# Altium PCB SteeringWheelConnectorBoard.PcbDoc
Units mm, origin at the board's own origin, x right, y up, seen from the top; angles counter-clockwise.
Board outline 16.27 x 32.5 mm, 2 copper layers (Top Layer, Bottom Layer); 2 components, 58 nets, 20 pads, 3 vias.
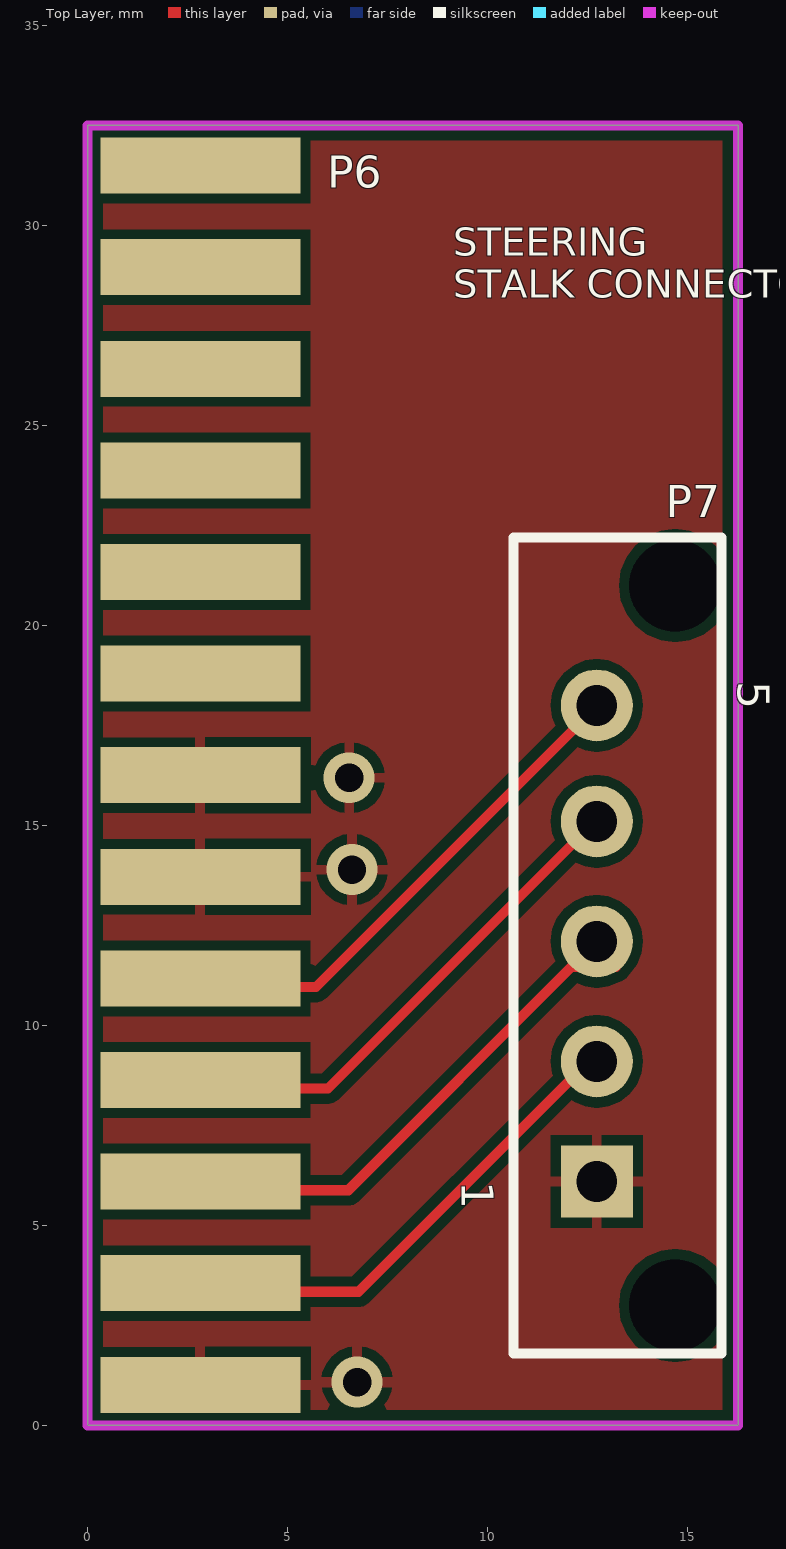
[diagram p0: Top Layer view]
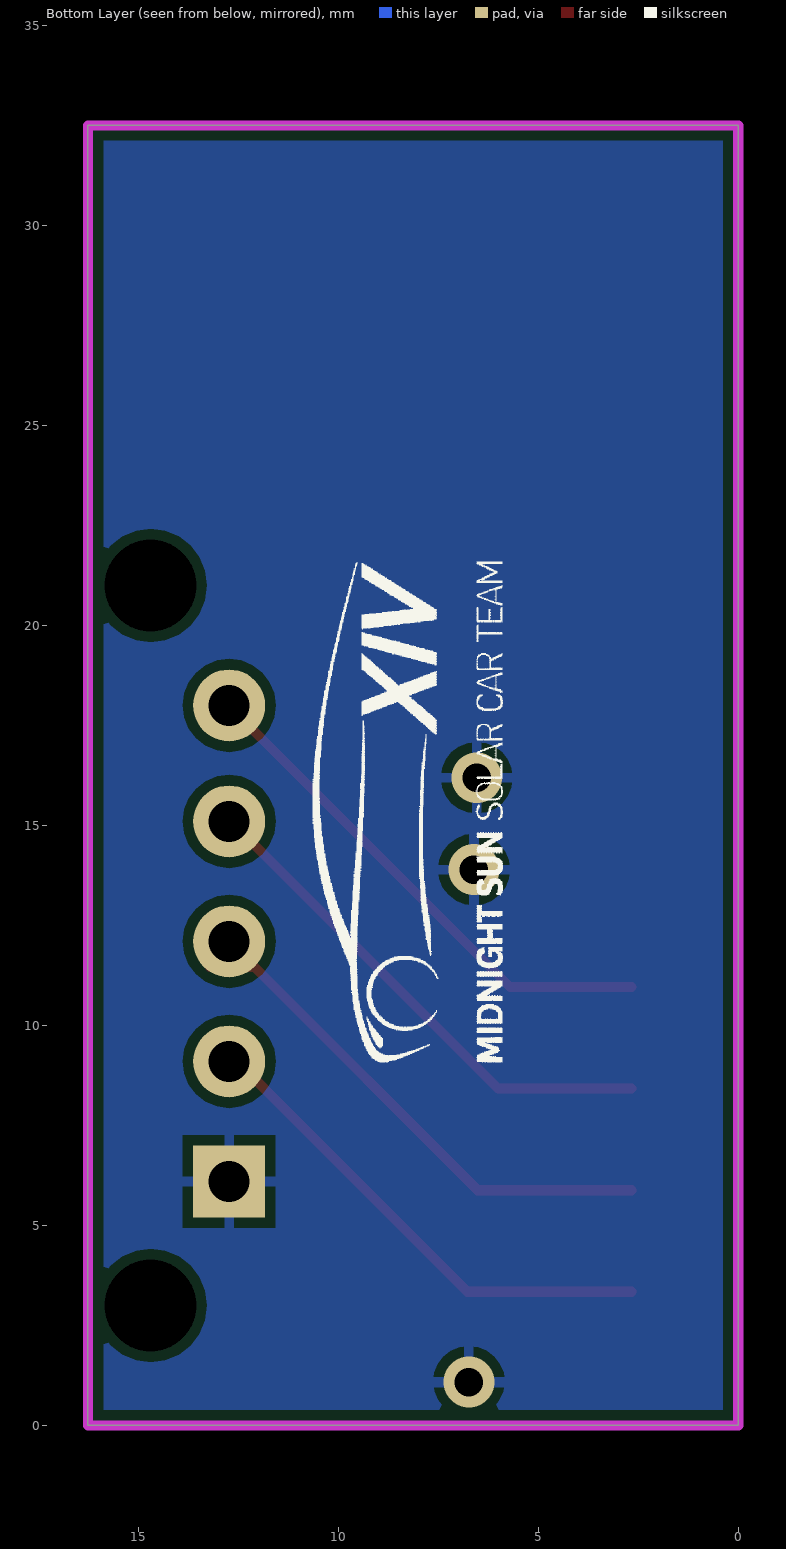
[diagram p1: Bottom Layer view, seen from below]

## Layer stack, top to bottom
Top Solder: solder mask 0.0102, Solder Resist, Dk 3.5
Top Layer: signal copper 0.0356
Dielectric 1: dielectric 0.32, FR-4, Dk 4.8
Bottom Layer: signal copper 0.0356
Bottom Solder: solder mask 0.0102, Solder Resist, Dk 3.5

## Board outline
0,32.5 0,0 16.268,0 16.268,32.5

## Design rules (kind name [scope] priority, off if disabled: settings)
Clearance [All] p1: gap=0.254 ignorepadtopadclearanceinfootprint=FALSE except(0: Arc-Hole Track-Hole SMDPad-Hole THPad-Hole Via-Hole Fill-Hole Poly-Hole Region-Hole Text-Hole)
PolygonConnect [All] p1: connectstyle=Relief reliefconductorwidth=0.254 reliefentries=4 polygonreliefangle="90 Angle" airgapwidth=0.254
RoutingVias [All] p1: holewidth=0.711 width=1.27 viastyle="Through Hole" minholewidth=0.711 minwidth=1.27 maxholewidth=0.711 maxwidth=1.27
SolderMaskExpansion [All] p1: expansion=0.102
Width [All] p1: maxlimit=0.254 minlimit=0.254 preferedwidth=0.254
30 further rules are at their usual default settings.

## Components (designator, comment, footprint, x,y, rotation, side; value= is the part's Value field where it differs from the comment)
P6 "Footprint Only" "CONN 13POS CARD EDGE" 2.819,1.016 r90 top
P7 "CONN 5POS MICRO-FIT 3mm" "CONN, 5POS MICRO-FIT 3mm" 13.75,18 r270 top

## Footprints (in the part's own frame and the unit in brackets; to place one, negate y for a bottom-side part, rotate by r counter-clockwise, add the part's x,y. Pads: shape width x height; smd on the part's side, far side on the other; paste and mask are expansions set on the pad)
"CONN 13POS CARD EDGE" [mm]
  rect 1.4x5 smd: 1(0,0) 2(2.54,0) 3(5.08,0) 4(7.62,0) 5(10.16,0) 6(12.7,0) 7(15.24,0) 8(17.78,0) 9(20.32,0) 10(22.86,0) 11(25.4,0) 12(27.94,0) 13(30.48,0)
"CONN, 5POS MICRO-FIT 3mm" [mm]
  round 0 hole 2.3: 0(-3,0.94) 0(15,0.94)
  rect 1.8x1.8 hole 1.02: 1(11.9,-1.02)
  round 1.8 hole 1.02: 2(8.9,-1.02) 3(5.9,-1.02) 4(2.9,-1.02) 5(0,-1.02)
  silkscreen extent -4.2,-3.1 16.2,2.1, body extent -3.42,-4.16 15.22,1.45, height 9.45

## Part data
P6: library part "CONN 13POS 0.1\" CARD EDGE"
P7: library part "CONN 5POS ULTRA-FIT 0.138\"", "5 Positions Header Connector 0.138\" (3.50mm) Through Hole Tin", Current Rating=-, Insulation Color=Black, Manufacturer 1="Molex, LLC", Manufacturer Part Number 1=1722871105, Material Flammability Rating="UL94 V-0", Operating Temperature="-40°C ~ 105°C", Supplier Part Number 1=WM11704-ND, Voltage=400V, ComponentLink1Description=http://www.molex.com/pdm_docs/sd/1722871105_sd.pdf, ComponentLink1URL=http://www.molex.com/pdm_docs/sd/1722871105_sd.pdf, Connector Type=Header, Contact Finish - Mating=Tin, Contact Finish - Post=Tin, Contact Finish Thickness - Mating="60µin (1.52µm)", Contact Finish Thickness - Post="60µin (1.52µm)", Contact Length - Mating=-, Contact Length - Post="0.126\" (3.20mm)", Contact Material="Copper Alloy", Contact Shape=Square, Contact Type="Male Pin", Fastening Type="Latch Holder", Ingress Protection=-, Insulation Height="0.465\" (11.80mm)", Insulation Material="Liquid Crystal Polymer (LCP)", Mated Stacking Heights=26.99mm, Mounting Type="Through Hole", Number of Positions=5, Number of Positions Loaded=All, Number of Rows=1, Overall Contact Length=-, Packaging=Tray, Part Status=Active, Pitch - Mating="0.138\" (3.50mm)", Row Spacing - Mating=-, Series=UltraFit, Shrouding="Shrouded - 4 Wall", Style="Board to Cable/Wire", Supplier 1=Digi-Key, Termination=Solder

## Via types
v1: diameter 1.27, hole 0.711, Top Layer to Bottom Layer, tented both sides, 3 vias

## Nets (pads, with @x,y where several pads share a name; then routed paths per layer and width w, separated by ;. In a path a pad name is that pad's centre, name@x,y a point inside that pad or via, vN(x,y) a via of type N, cw(c..) or ccw(c..) an arc to the next point about the centre after c; other vN are vias at no path point)
3V3: 
+12V: 
CC_DISTANCE: P6.3 P7.3 | length 12.9
  Top Layer w0.254: P6.3@2.667,5.882 6.517,5.882 12.094,11.459 P7.3@13.208,11.459
CC_ON/O\F\F\: P6.5 P7.5 | length 13.6
  Top Layer w0.254: P6.5@2.667,10.962 5.71,10.962 P7.5@13.208,18.459
CC_SET: P6.2 P7.2 | length 12.4
  Top Layer w0.254: P6.2@2.667,3.342 6.771,3.342 P7.2@12.63,9.201
CC_SPEED: P6.4 P7.4 | length 13.2
  Top Layer w0.254: P6.4@2.667,8.422 6.009,8.422 12.546,14.959 P7.4@13.208,14.959
FILTERED_CC_DECREASE_SPEED: 
FILTERED_CC_INCREASE_SPEED: 
FILTERED_CC_ON/O\F\F\: 
FILTERED_HIGH_BEAM_BACK: 
FILTERED_HIGH_BEAM_FWD: 
FILTERED_HORN: 
FILTERED_LANE_ASSIST: 
FILTERED_REGEN_BRAKE_TOGGLE: 
GND: P6.1 P6.6 P6.7 P7.1
  other v1: 6.737,1.085 6.61,13.896 6.538,16.192
HIGH_BEAM_BACK: 
HIGH_BEAM_FWD: 
HORN: 
LANE_ASSIST: 
NetC3_1: 
NetLED1_1: 
NetP5_1: 
NetP5_2: 
NetR3_2: 
NetR6_2: 
NetR9_2: 
NetR14_2: 
NetR18_2: 
PA0_AN0: 
PA1_CC_DECREASE_SPEED: 
PA2_CC_INCREASE_SPEED: 
PA3_AN3_TURN_SIGNAL_STALK: 
PA4_REGEN_BRAKE_TOGGLE: 
PA5_CC_ON/O\F\F\: 
PA6_LANE_ASSIST: 
PA7_HIGH_BEAM_FWD: 
PA8: 
PA9: 
PA10: 
PA15/LED_RED: 
PB0_HIGH_BEAM_BACK: 
PB1_HORN: 
PB2: 
PB3/LED_GREEN: 
PB4/LED_BLUE: 
PB5/LED_BLUE: 
PB6/USART1_TX: 
PB7/USART1_RX: 
PB8/I2C1_SCL: 
PB9/I2C1_SDA: 
PB10/USART3_TX/I2C2_SCL: 
PB11/USART3_RX/I2C2_SDA: 
PB12/SPI2_NSS: 
PB13/SPI2_SCK: 
PB14/SPI2_MISO: 
PB15/SPI2_MOSI: 
PC13: 
TURN_SIGNAL_STALK: 
pads on no net: P6.8 P6.9 P6.10 P6.11 P6.12 P6.13 P7.0

## Polygon pours and split planes (outlines as drawn)
GND on Bottom Layer "Top Layer-GND 1" (solid, pour order 0): 0,32.5 16.268,32.5 16.268,0 0,0
GND on Top Layer "Top Layer-GND" (solid, pour order 2): 0,32.5 16.256,32.5 16.256,0 0,0

## Keep-outs
Keep-Out Layer:
  the board outline again, w0.254

## Silkscreen, mask and mechanical layers (free items; w line width, h text height)
Top Overlay:
  text "STEERING / STALK CONNECTOR" at 9.144,28.194 h0.7
Bottom Overlay:
  drawing of 32 lines, arcs and shapes, not listed

## Text inside footprints (layer, text, board x,y; h text height)
P7: Top Overlay "5" at 16.25,18.6 h0.8 r270; Top Overlay "1" at 9.35,6.1 h0.8 r270